# EAGLE board smdlpc936 (EAGLE 5.00)
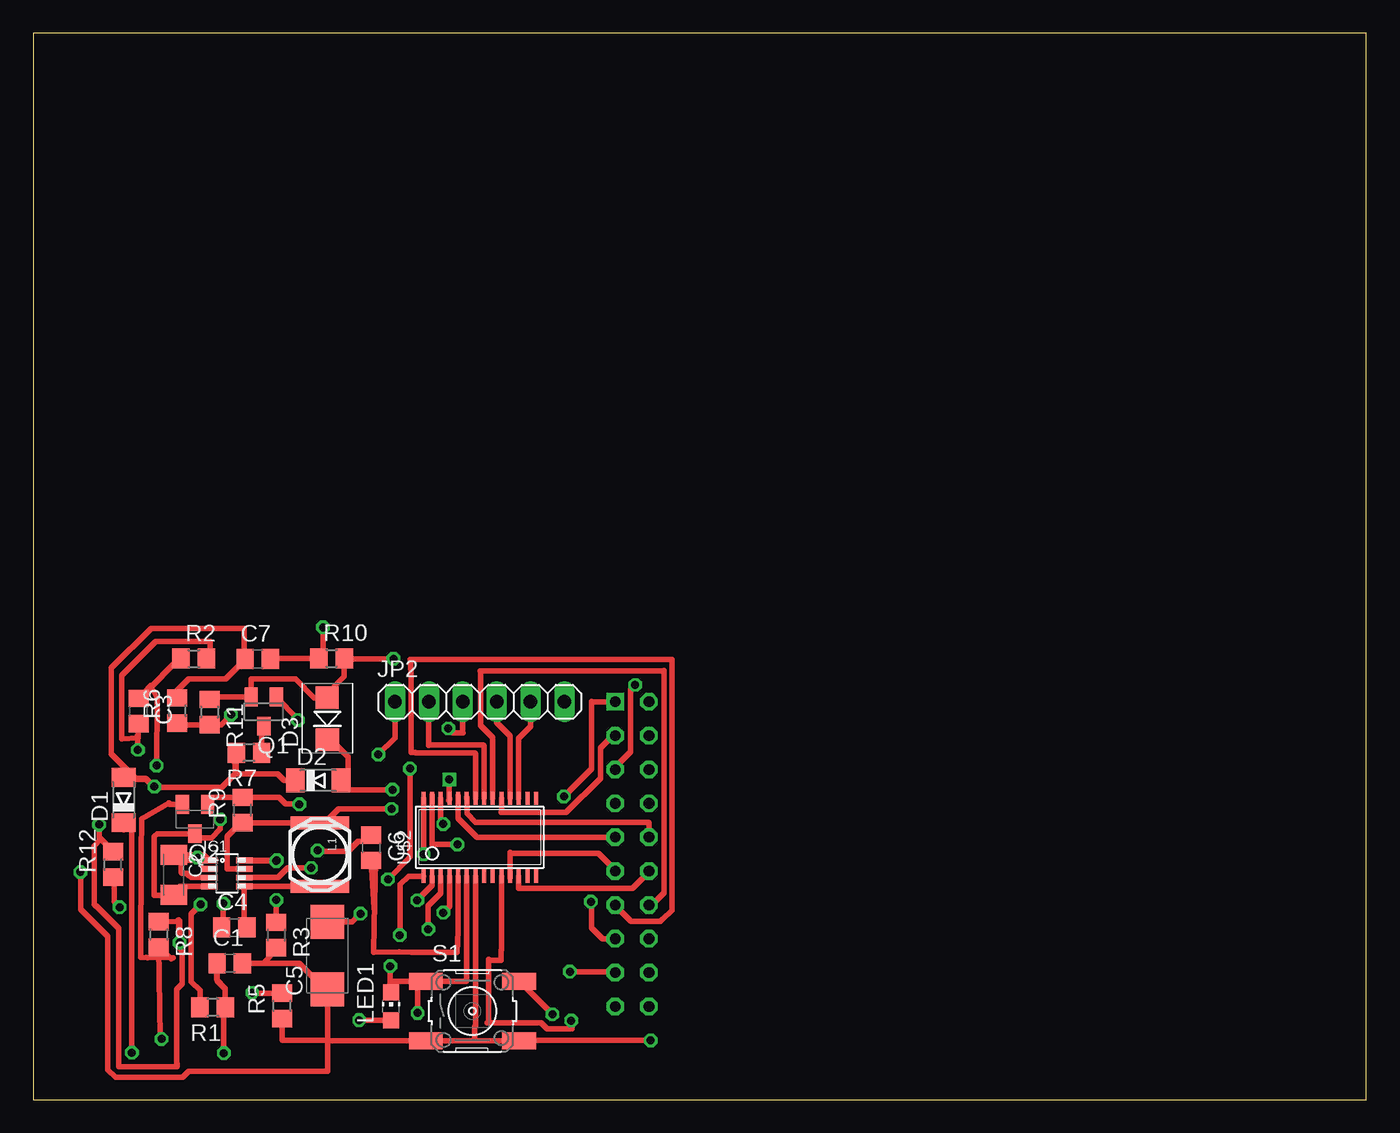
[diagram p0: board, top side]
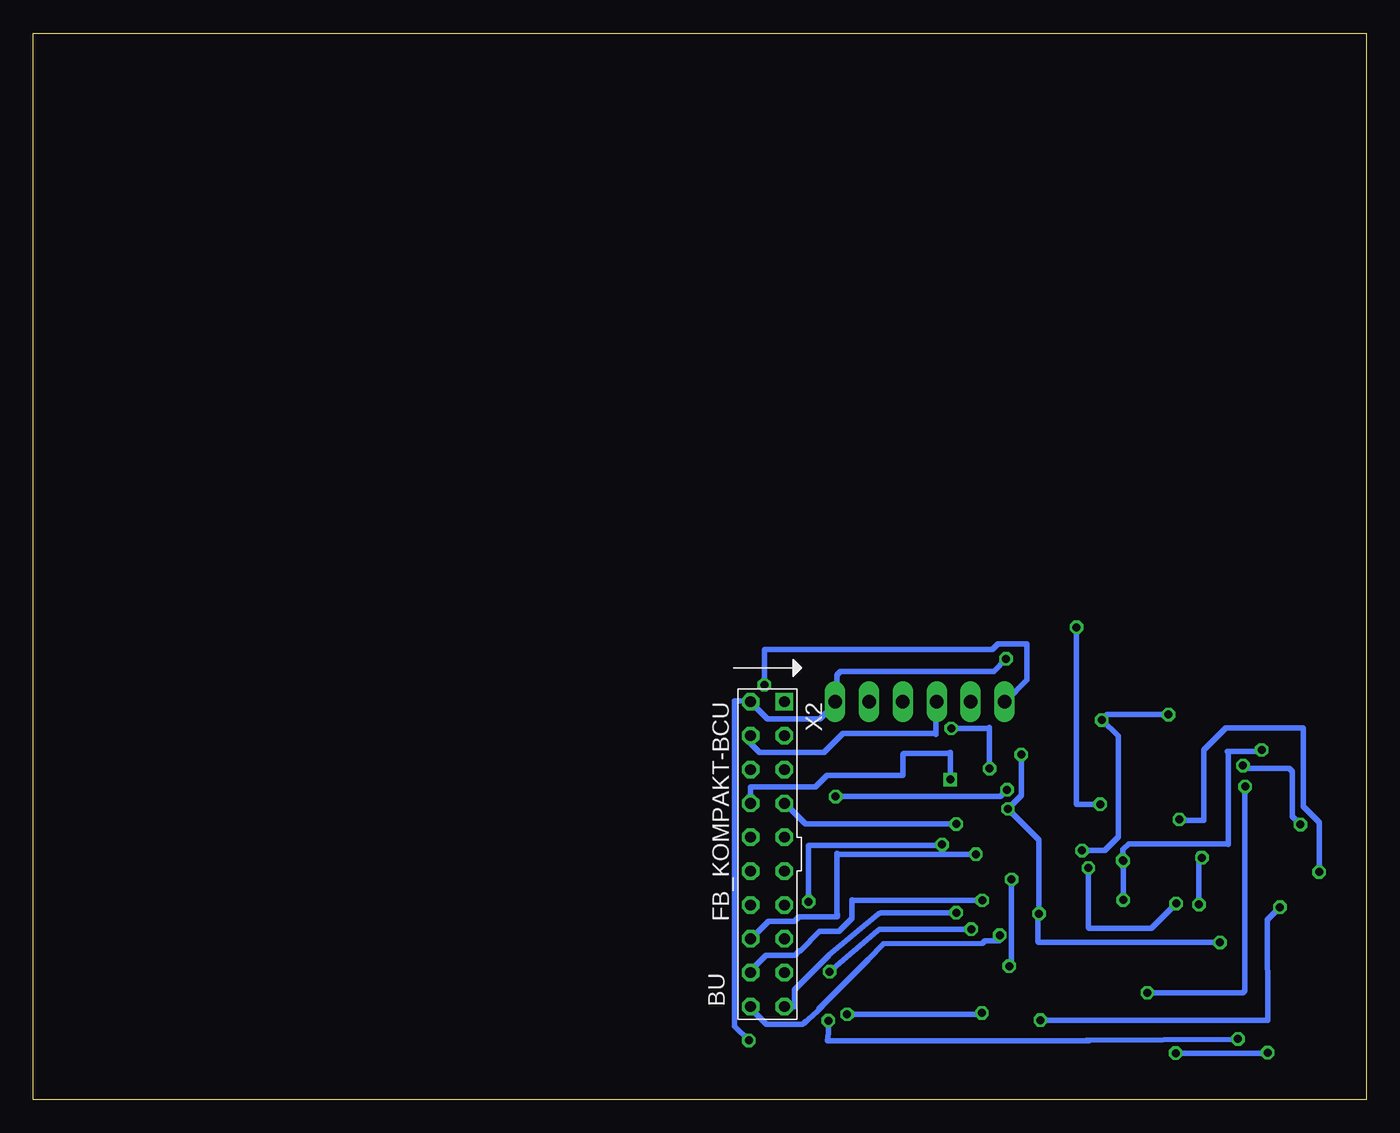
[diagram p1: board, bottom side, seen from below]

Size 100 x 80 mm. Coordinates in mm from the lower left corner, seen from the top.
Outline: 0,0 100,0 100,80 0,80 0,0
Copper layers (1*16): Top 0.035mm / dielectric 1.5mm / Bottom 0.035mm
Design rules "default": minimum track width 10mil, minimum drill 24mil, track to track 8mil, track to pad 8mil, pad to pad 8mil, via to via 8mil, smd to smd 8mil, copper to edge 40mil, drill to drill 8mil, minimum pad ring 10mil, minimum via ring 8mil, stop-mask expansion 4mil, vias tented up to drill 0mil, thermal gap 10mil

## Footprints (pad centres in the part's own frame; a part is rotated, then mirrored left to right if it is on the bottom)
C0805 = smd 1.3 x 1.5: 1 -0.95,0; 2 0.95,0
C1206K = smd 1.5 x 2: 1 -1.5,0; 2 1.5,0
C/6032-28R = smd 2.55 x 2.5: + 2.525,0; - -2.525,0
MINIMELF = smd 1.4 x 1.8: A 1.7,0; C -1.7,0
SMA = smd 1.67 x 1.73: 1 -1.576,0; 2 1.58,0.014
TSOT23-8 = smd 0.44 x 1.22: 1 -0.975,-1.31; 2 -0.325,-1.31; 3 0.325,-1.31; 4 0.975,-1.31; 5 0.975,1.31; 6 0.325,1.31; 7 -0.325,1.31; 8 -0.975,1.31
1X06 = drill 1.016 long: 1 -6.35,0; 2 -3.81,0; 3 -1.27,0; 4 1.27,0; 5 3.81,0; 6 6.35,0
DS1605 = smd 1 x 4.4: P$1 -2.38,0; P$2 2.38,0
CHIP-LED0805 = smd 1.2 x 1.2: A 0,-1.05; C 0,1.05
SOT23 = smd 1 x 1.4: 1 -0.95,-1.1; 2 0.95,-1.1; 3 0,1.1
SOT23-BEC = smd 1 x 1.4: B -0.95,-1.1; C 0,1.1; E 0.95,-1.1
R0805 = smd 1.3 x 1.5: 1 -0.95,0; 2 0.95,0
SMS1600 = smd 2.54 x 1.27: 1 -3.493,2.223; 2 3.493,2.223; 3 -3.493,-2.223; 4 3.493,-2.223
TSSOP28 = smd 0.305 x 0.991: 1 -4.225,-2.918; 2 -3.575,-2.918; 3 -2.925,-2.918; 4 -2.275,-2.918; 5 -1.625,-2.918; 6 -0.975,-2.918; 7 -0.325,-2.918; 8 0.325,-2.918; 9 0.975,-2.918; 10 1.625,-2.918; 11 2.275,-2.918; 12 2.925,-2.918; 13 3.575,-2.918; 14 4.225,-2.918; 15 4.225,2.918; 16 3.575,2.918; 17 2.925,2.918; 18 2.275,2.918; 19 1.625,2.918; 20 0.975,2.918; 21 0.325,2.918; 22 -0.325,2.918; 23 -0.975,2.918; 24 -1.625,2.918; 25 -2.275,2.918; 26 -2.925,2.918; 27 -3.575,2.918; 28 -4.225,2.918
EIB_10X2_BUCHSE = drill 0.8 square: EIB1 0,0 | drill 0.8 octagon: EIB2 0,-2.54; EIB3 -2.54,0; EIB4 -2.54,-2.54; EIB5 -5.08,0; EIB6 -5.08,-2.54; EIB7 -7.62,0; EIB8 -7.62,-2.54; EIB9 -10.16,0; EIB10 -10.16,-2.54; EIB11 -12.7,0; EIB12 -12.7,-2.54; EIB13 -15.24,0; EIB14 -15.24,-2.54; EIB15 -17.78,0; EIB16 -17.78,-2.54; EIB17 -20.32,0; EIB18 -20.32,-2.54; EIB19 -22.86,0; EIB20 -22.86,-2.54

## Placement (x,y rotation side)
C1  100nF  [C0805]  14.75,10.23 0 top
C2  2.2µF  [C1206K]  10.55,16.86 270 top
C3  22pF  [C0805]  7.9,29.14 270 top
C4  220nF  [C0805]  15.08,12.91 0 top
C5  22µF / Low ESR  [C/6032-28R]  22.06,10.79 90 top
C6  100nF  [C0805]  25.36,18.89 270 top
C7  100nF  [C0805]  16.84,33.06 0 top
D1  LL4148  [MINIMELF]  6.77,22.47 90 top
D2  LL4148  [MINIMELF]  21.37,23.94 0 top
D3  SMAJ43CA  [SMA]  22.06,28.57 90 top
IC1  LT3470ES8  [TSOT23-8]  14.53,16.98 270 top
JP2  [1X06]  33.49,29.84 0 top
L1  33µ  [DS1605]  21.51,18.38 270 top
LED1  [CHIP-LED0805]  26.83,6.98 0 top
Q1  2N7002  [SOT23]  17.29,29.11 180 top
Q2  BC857  [SOT23-BEC]  12.13,21.04 180 top
R1  1  [R0805]  13.46,6.91 180 top
R2  324K  [R0805]  12.03,33.08 0 top
R3  200K  [R0805]  18.22,12.34 270 top
R5  100K  [R0805]  18.67,7.03 90 top
R6  390K  [R0805]  10.81,29.18 90 top
R7  68  [R0805]  16.18,26.02 180 top
R8  10K  [R0805]  9.42,12.39 270 top
R9  82K  [R0805]  15.71,21.71 90 top
R10  47K  [R0805]  22.38,33.1 0 top
R11  12K  [R0805]  13.22,29.07 270 top
R12  560  [R0805]  5.98,17.64 90 top
S1  [SMS1600]  32.94,6.64 0 top
U$2  [TSSOP28]  33.49,19.68 0 top
X2  FB_KOMPAKT-BCU  [EIB_10X2_BUCHSE]  43.65,29.84 90 top

## Library data of the parts
C1-C7 R1-R3 R5-R12 = rcl
D1 D2 = diode-os
D3 IC1 L1 S1 = own
JP2 = pinhead
LED1 = led
Q1 = transistors_gaui
Q2 = transistor-pnp
U$2 = freebuslpc
X2 = EIB_Freebus

## Nets
EIB+: D2.A D3.1 X2.EIB1
GND: C1.2 C2.2 C5.- D3.2 IC1.4 JP2.6 Q1.2 Q2.C R3.2 R5.1 R10.2 R11.1 S1.3 S1.4 U$2.7 X2.EIB2
N$1: C3.2 IC1.8 R2.2 R3.1
N$2: C6.2 U$2.5
N$4: C2.1 IC1.1 IC1.3 R1.2
N$5: C7.2 Q2.B R9.2 R10.1
N$6: U$2.11 X2.EIB11
N$7: C4.2 IC1.5 L1.P$2
N$8: C4.1 IC1.6
N$9: Q1.3 R7.1
N$10: C1.1 D1.C R1.1
N$11: C6.1 Q1.1 R6.1 R11.2
N$12: C7.1 D1.A D2.C R5.2 R6.2 R7.2
N$13: Q2.E R8.2 U$2.10
N$14: U$2.12 X2.EIB12
N$15: U$2.19 X2.EIB3
N$16: U$2.26 X2.EIB7
N$17: U$2.25 X2.EIB8
N$18: U$2.24 X2.EIB9
N$19: U$2.23 X2.EIB10
N$20: U$2.22 X2.EIB13
N$21: U$2.20 X2.EIB14
N$22: LED1.A R12.1
N$23: U$2.27 X2.EIB15
N$24: U$2.28 X2.EIB16
N$25: U$2.1 X2.EIB20
N$26: U$2.2 X2.EIB18
N$27: U$2.3 X2.EIB17
N$28: U$2.4 X2.EIB19
N$29: JP2.2 U$2.21
N$30: JP2.4 U$2.18
N$31: JP2.5 U$2.17
PROG: JP2.3 LED1.C S1.1 S1.2 U$2.6 X2.EIB4
VCC: C3.1 C5.+ IC1.7 JP2.1 L1.P$1 R2.1 R8.1 R9.1 R12.2 X2.EIB5

## Tracks (layer width: path | path; a pad name or v marks a point on that pad's centre or on a via)
EIB+  (via drill 0.6)
  Top 0.406: X2.EIB1 41.9,29.84 41.87,29.87 41.87,24.79 v39.81,22.73 | 23.62,23.49 23.48,23.35 23.59,23.25 v26.95,23.25 | D2.A 23.62,23.49 | D3.1 22.06,27.25 22.08,27.26 23.62,25.72 23.62,23.49
  Bottom 0.406: v39.81,22.73 27.46,22.73 v26.95,23.25
GND  (via drill 0.6)
  Top 0.406: U$2.7 33.16,5.51 33.12,5.47 33.12,4.44 33.09,4.41 36.62,4.41 36.63,4.42 | S1.3 S1.4 36.63,4.42 | S1.3 28.79,4.42 28.56,4.65 28.76,4.65 29,4.41 29.01,4.42 S1.3 | S1.3 22.1,4.42 22.08,4.44 | 22.08,7.05 22.08,8.25 C5.- 21.99,8.27 21.94,8.21 19.93,10.23 17.23,10.23 | 22.08,7.05 22.08,4.44 | 23.33,33.18 23.31,33.2 | 23.33,33.18 R10.2 23.33,31.74 21.77,30.18 21.8,30.15 D3.2 21.08,30.15 19.68,31.55 16.49,31.55 16.45,31.52 16.38,31.52 16.35,31.55 Q1.2 13.82,30.21 13.57,30.45 13.43,30.31 R11.1 | v27.02,33.06 23.45,33.06 23.33,33.18 | 36.63,4.42 36.65,4.44 v46.32,4.44 | 22.08,4.44 18.72,4.44 18.68,4.47 18.68,6.12 18.67,6.1 R5.1 | 10.66,15.5 10.66,15.49 | 10.66,15.5 C2.2 10.51,15.39 10.59,15.32 9.08,15.32 9.08,19.75 9.28,19.94 Q2.C 12.09,19.94 12.06,19.92 12.34,19.64 13.37,19.64 14.02,20.29 v14.02,21.02 14.02,21.05 | 10.66,15.5 11.17,16 IC1.4 11.03,16 11,15.97 11.27,15.97 11.31,15.94 11.24,15.94 11.21,15.9 | R3.2 18.3,11.3 17.23,10.23 | 17.23,10.23 C1.2 19.96,10.23 21.8,8.39 21.8,7.32 22.08,7.05 | 22.08,7.05 22.08,2.11 11.65,2.11 11.21,1.66 6.16,1.66 5.58,2.24 5.58,12.23 3.56,14.26 3.56,17.04 v3.52,17.07
  Bottom 0.406: X2.EIB2 44.92,28.57 40.98,28.57 | 39.71,29.84 39.7,29.84 40.98,28.57 | 39.71,29.84 JP2.6 | 39.71,29.84 39.71,31.86 39.43,32.14 27.94,32.14 v27.02,33.06 | 40.98,28.57 44.92,28.57 46.26,29.9 47.39,29.9 47.39,5.5 v46.32,4.44 | v3.52,17.07 3.52,20.81 4.72,22.01 4.72,27.85 4.76,27.88 10.52,27.88 12.17,26.23 12.17,20.95 13.95,20.95 v14.02,21.02
N$1  (via drill 0.6)
  Top 0.406: R3.1 18.22,14.68 v18.24,14.98 | v18.24,17.89 15.94,17.89 15.88,17.95 IC1.8 v18.26,17.95 v18.27,17.96 | 7.88,27.29 C3.2 | 7.88,27.29 7.87,27.13 6.64,27.06 6.64,31.83 8.6,33.78 9.18,34.37 13.26,34.37 13.26,33.1 12.99,32.82 12.99,32.83 R2.2 | 7.78,27.29 7.77,27.3 | 7.78,27.29 7.88,27.29 | v7.84,26.23 7.84,27.23 7.78,27.29
  Bottom 0.406: v18.24,14.98 v18.24,17.89 | v18.27,17.96 18.27,18.75 17.82,19.2 10.42,19.2 10.35,19.13 10.35,26.06 10.42,26.13 7.95,26.13 v7.84,26.23
N$2
  Top 0.406: U$2.5 31.86,12.66 31.78,11.03 28.39,11.03 27.43,11.06 25.54,11.03 25.57,13.05 25.68,17.96 25.56,14.3 C6.2
N$4  (via drill 0.6)
  Top 0.406: R1.2 12.51,8.18 11.86,8.83 11.86,13.95 v12.54,14.63 | 12.45,18.36 C2.1 | 12.45,18.36 12.79,18.36 13.2,17.95 IC1.1 11.4,17.95 11.11,18.24 11.11,17.04 11.18,16.97 11.52,16.97 11.69,16.79 | 11.69,16.79 | 11.69,16.79 11.83,16.65 12.94,16.65 12.97,16.62 13,16.65 IC1.3 | 12.45,18.36 12.45,18.42 12.49,18.45 v12.32,18.14
  Bottom 0.406: v12.54,14.63 12.54,18.43 v12.32,18.14
N$5  (via drill 0.6)
  Top 0.406: 17.61,33.1 17.66,33.05 C7.2 | 17.61,33.1 R10.1 21.56,33.1 21.73,33.27 v21.73,35.43 | 17.61,33.1 17.58,33.13 | Q2.B 12.92,22.14 12.92,22.15 13.43,22.66 R9.2 18.44,22.66 18.92,22.18 19.92,22.18 v19.95,22.15
  Bottom 0.406: v19.95,22.15 21.7,22.15 21.73,22.18 v21.73,35.43
N$6
  Top 0.406: X2.EIB11 43.65,17.24 42.41,18.48 35.83,18.48 35.76,18.54 35.76,16.62 35.77,16.63 U$2.11
N$7
  Top 0.406: 21.29,16 15.7,16.01 | 21.29,16 IC1.5 15.84,13.19 16.11,12.92 16.1,12.91 C4.2 | L1.P$2 21.4,16.13 21.29,16
N$8  (via drill 0.6)
  Top 0.406: IC1.6 18.36,16.65 19.09,17.38 v20.84,17.38 | C4.1 14.22,12.81 14.26,12.85 v14.26,14.7
  Bottom 0.406: v20.84,17.38 20.84,12.92 20.77,12.85 16.11,12.85 v14.26,14.7
N$9
  Top 0.406: Q1.3 17.22,28.01 17.21,28.02 17.13,27.94 R7.1
N$10  (via drill 0.6)
  Top 0.406: R1.1 14.41,8.3 13.81,8.9 13.81,10.1 13.8,10.11 C1.1 13.8,10.49 13.74,10.55 13.74,9 14.39,8.35 14.39,6.84 14.29,6.74 v14.29,3.48 | D1.C 6.75,20.47 6.78,20.23 7.4,20.36 v7.4,3.51
  Bottom 0.406: v14.29,3.48 7.43,3.48 v7.4,3.51
N$11  (via drill 0.6)
  Top 0.406: R6.1 10.81,28.14 10.86,28.09 10.9,28.12 R11.2 14.09,28.12 v14.84,28.88 | 18.21,30.21 18.1,30.32 | 18.21,30.21 Q1.1 | v19.85,28.46 19.85,28.57 18.21,30.21 | C6.1 25.36,19.56 25.16,19.37 24.34,19.37 24.34,19.33 23.62,18.61 21.39,18.61 v21.32,18.68
  Bottom 0.406: v14.84,28.88 19.44,28.88 19.81,28.5 | v21.32,18.68 19.61,18.68 18.58,19.71 18.58,27.26 19.81,28.5 | 19.81,28.5 v19.85,28.46
N$12  (via drill 0.6)
  Top 0.406: R6.2 10.81,30.71 11.65,31.55 14.43,31.55 15.89,33.02 C7.1 15.89,33.11 15.84,33.17 15.84,35.36 8.84,35.36 5.89,32.41 5.85,32.38 5.85,25.92 7.74,24.04 8.46,24.04 9.08,23.42 14.12,23.42 15.12,24.41 15.22,24.41 | D2.C 18.82,23.94 18.34,24.41 15.22,24.41 | 15.22,26.03 R7.2 | 15.22,24.55 15.22,26.03 | 15.22,24.55 15.22,24.41 | 15.22,26.03 15.15,26.1 | D1.A 8.43,24.11 9.08,23.45 | 9.08,23.45 9.11,23.42 14.12,23.42 15.25,24.55 15.22,24.55 | 15.15,26.1 | 15.15,26.1 15.05,25.99 15.05,25.34 15.15,25.24 15.15,24.48 15.22,24.41 | R5.2 16.44,7.98 v16.42,8.01 | 9.11,23.49 9.08,23.45 | v9.08,23.49 9.11,23.49 | 9.11,23.49 9.15,23.52
  Bottom 0.406: v16.42,8.01 9.25,8.01 9.11,8.15 9.11,23.45 v9.08,23.49
N$13  (via drill 0.6)
  Top 0.406: U$2.10 35.12,11.24 35.07,11.2 35.07,10.45 34.22,10.45 34.15,10.51 34.15,5.85 34.05,5.74 38.09,5.74 38.54,5.3 40.43,5.3 v40.36,5.92 | Q2.E 10.25,22.14 10.14,22.25 10.18,22.25 8.12,21.05 8.08,18.51 8.05,10.65 8.56,10.62 8.46,10.65 10.49,10.62 10.35,10.55 R8.2 9.53,4.65 v9.63,4.54
  Bottom 0.406: v40.36,5.92 40.36,5.02 40.43,4.41 20.95,4.41 | 20.95,4.41 20.81,4.41 20.77,4.44 | v9.63,4.54 9.49,4.51 20.95,4.44 20.95,4.41
N$14
  Top 0.406: U$2.12 36.41,15.97 36.41,15.83 44.95,15.83 46.22,17.1 X2.EIB12
N$15
  Top 0.406: U$2.19 35.12,21.54 35.11,21.53 39.98,21.53 42.55,24.11 42.55,26.37 43.55,27.36 43.61,27.3 X2.EIB3
N$16  (via drill 0.6)
  Top 0.406: U$2.26 30.56,20.86 v30.75,20.67
  Bottom 0.406: X2.EIB7 43.65,22.25 42.07,20.67 v30.75,20.67
N$17  (via drill 0.6)
  Top 0.406: 31.2,22.49 31.21,22.51 U$2.25 | 31.2,22.49 v31.2,24 | 31.2,22.49 31.16,22.46
  Bottom 0.406: X2.EIB8 46.19,23.42 46.15,23.45 41.32,23.45 40.46,24.31 34.8,24.31 34.77,24.34 34.77,25.89 34.7,25.96 31.34,25.96 31.3,25.99 31.23,25.99 31.2,26.03 v31.2,24
N$18
  Top 0.406: X2.EIB9 33.29,19.68 31.89,21.08 31.89,22.8 31.86,22.82 | 31.86,22.82 31.85,22.83 | 31.86,22.82 U$2.24
N$19
  Top 0.406: X2.EIB10 46.19,20.77 46.15,20.81 33.19,20.81 32.54,21.46 32.54,22.66 32.52,22.64 U$2.23
N$20
  Top 0.406: U$2.22 33.16,25.95 33.12,25.99 28.7,25.99 28.66,26.03 28.35,26.03 28.35,32.27 28.32,32.31 28.32,32.99 28.28,33.03 47.9,33.03 47.9,14.19 47.22,13.5 47.18,13.5 47.05,13.36 44.85,13.36 43.61,14.6 | 43.61,14.6 43.55,14.67 | 43.61,14.6 X2.EIB13
N$21
  Top 0.406: U$2.20 34.46,27.15 33.57,28.05 33.57,32.14 33.53,32.17 47.28,32.17 47.32,32.2 47.32,15.52 46.29,14.5 X2.EIB14
N$22  (via drill 0.6)
  Top 0.406: LED1.A 24.46,5.93 v24.44,5.95 | v6.47,14.43 6.47,14.46 6.06,14.87 6.06,16.59 5.98,16.67 R12.1
  Bottom 0.406: v24.44,5.95 7.4,5.95 7.43,13.47 v6.47,14.43
N$23  (via drill 0.6)
  Top 0.406: X2.EIB15 42.69,12.06 41.87,12.88 41.87,14.8 v41.83,14.84 | v31.82,19.13 29.93,19.13 29.93,22.87 29.91,22.85 U$2.27
  Bottom 0.406: v41.83,14.84 41.83,19.03 41.8,19.06 31.89,19.06 v31.82,19.13
N$24  (via drill 0.6)
  Top 0.406: U$2.28 29.27,18.42 v29.28,18.41
  Bottom 0.406: v29.28,18.41 39.64,18.41 39.7,18.48 39.7,13.95 39.67,13.91 39.67,13.74 39.7,13.71 42.55,13.71 42.89,13.36 44.85,13.36 46.19,12.02 | 46.19,12.02 46.29,11.92 | 46.19,12.02 X2.EIB16
N$25  (via drill 0.6)
  Top 0.406: U$2.1 28.15,16.76 27.53,16.14 27.53,12.37 v27.5,12.33
  Bottom 0.406: v27.5,12.33 27.5,11.99 27.56,11.92 28.59,11.92 28.8,11.72 36.21,11.68 37.34,10.51 41.04,6.81 40.42,7.39 41.18,6.64 42.17,5.71 42.04,5.88 42.28,5.64 44.99,5.64 46.29,6.95 46.25,6.98 X2.EIB20
N$26  (via drill 0.6)
  Top 0.406: U$2.2 29.91,16.06 v28.8,14.94
  Bottom 0.406: v28.8,14.94 38.54,14.94 38.57,14.98 38.57,13.6 39.57,12.61 41.01,12.61 42.45,11.17 42.52,11.17 42.66,11.03 42.66,11 42.83,10.82 45.02,10.82 46.19,9.65 X2.EIB18
N$27  (via drill 0.6)
  Top 0.406: U$2.3 30.56,15.47 29.62,14.53 v29.62,12.78 | 43.68,9.52 | 43.68,9.52 X2.EIB17 | v40.25,9.59 43.62,9.59 43.68,9.52
  Bottom 0.406: v29.62,12.78 36.52,12.78 36.69,12.67 v40.25,9.59
N$28  (via drill 0.6)
  Top 0.406: U$2.4 31.21,14.48 v30.75,14.02
  Bottom 0.406: v30.75,14.02 36.41,14.02 36.58,13.94 40.36,10.82 40.36,10.79 42.89,8.25 42.89,6.98 42.93,6.95 43.55,6.95 43.58,6.98 X2.EIB19
N$29
  Top 0.406: U$2.21 33.81,26.53 33.74,26.61 29.69,26.61 29.66,26.58 29.66,29.6 29.59,29.66 29.68,29.76 JP2.2
N$30
  Top 0.406: U$2.18 35.76,27.3 34.77,28.29 34.77,29.7 34.84,29.77 JP2.4
N$31
  Top 0.406: U$2.17 36.41,27.09 37.3,27.98 37.3,29.73 37.2,29.84 JP2.5
PROG  (via drill 0.6)
  Top 0.406: U$2.6 32.52,8.91 32.47,8.87 29.72,8.87 29.59,9 S1.1 | S1.1 29.22,8.86 29.14,8.94 28.83,8.63 v28.83,6.5 | S1.1 26.85,8.87 26.84,8.87 26.84,7.8 26.83,7.82 LED1.C 26.83,8.33 26.67,8.49 26.77,8.59 v26.77,10 | JP2.3 32.22,27.51 32.23,27.5 31.47,27.5 v31.13,27.85 | v28.25,24.83 28.25,18.2 v26.6,16.52 | S1.2 36.49,8.86 v38.95,6.4
  Bottom 0.406: X2.EIB4 46.19,26.72 45.54,26.06 40.67,26.06 39.26,27.47 32.33,27.47 32.26,27.4 32.26,29.6 32.13,29.73 32.22,29.83 JP2.3 | v31.13,27.85 28.35,27.85 28.28,27.91 28.28,24.86 v28.25,24.83 | v26.6,16.52 26.6,9.79 v26.77,10 | v38.95,6.4 28.94,6.4 v28.83,6.5
VCC  (via drill 0.6)
  Top 0.406: X2.EIB5 43.65,24.93 44.82,26.1 44.82,30.76 v45.16,31.11 | JP2.1 27.14,27.15 v25.88,25.89 | v26.88,21.81 22.9,21.81 22.04,20.95 22.06,20.93 L1.P$1 21.31,20.76 21.25,20.81 21.21,20.76 R9.1 15.71,20.84 15.66,20.88 14.53,19.75 14.53,17.31 14.54,17.3 IC1.7 | C5.+ 23.91,13.32 v24.55,13.95 | R2.1 10.95,33.08 8.38,30.51 C3.1 8.82,31.05 9.28,30.11 v9.25,25.06 | v10.96,11.78 11,11.82 11,13.4 10.98,13.38 R8.1 10.81,13.38 10.9,13.47 10.9,11.37 11.17,11.1 11.17,8.7 10.76,8.28 10.76,2.72 10.79,2.69 10.79,2.48 10.76,2.45 6.44,2.45 6.4,2.48 6.4,12.85 4.72,14.53 4.65,14.53 4.55,14.63 4.55,19.03 5.06,19.54 | R12.2 5.99,18.61 5.06,19.54 | v4.93,20.64 4.93,19.68 5.06,19.54
  Bottom 0.406: v45.16,31.11 45.16,33.72 45.09,33.78 28.04,33.78 27.63,34.2 25.44,34.2 25.44,31.48 27.08,29.84 27.09,29.84 JP2.1 | v25.88,25.89 25.88,22.8 v26.88,21.81 | v26.88,21.81 26.91,21.84 | 24.55,13.98 24.55,19.47 v26.88,21.81 | v10.96,11.78 24.58,11.78 24.65,11.85 24.65,13.88 24.55,13.98 | 24.55,13.98 v24.55,13.95 | v9.25,25.06 8.87,24.86 5.79,24.86 5.55,24.62 5.55,21.26 v4.93,20.64